# EAGLE board Quarfinder rj45 (EAGLE 9.0.1)
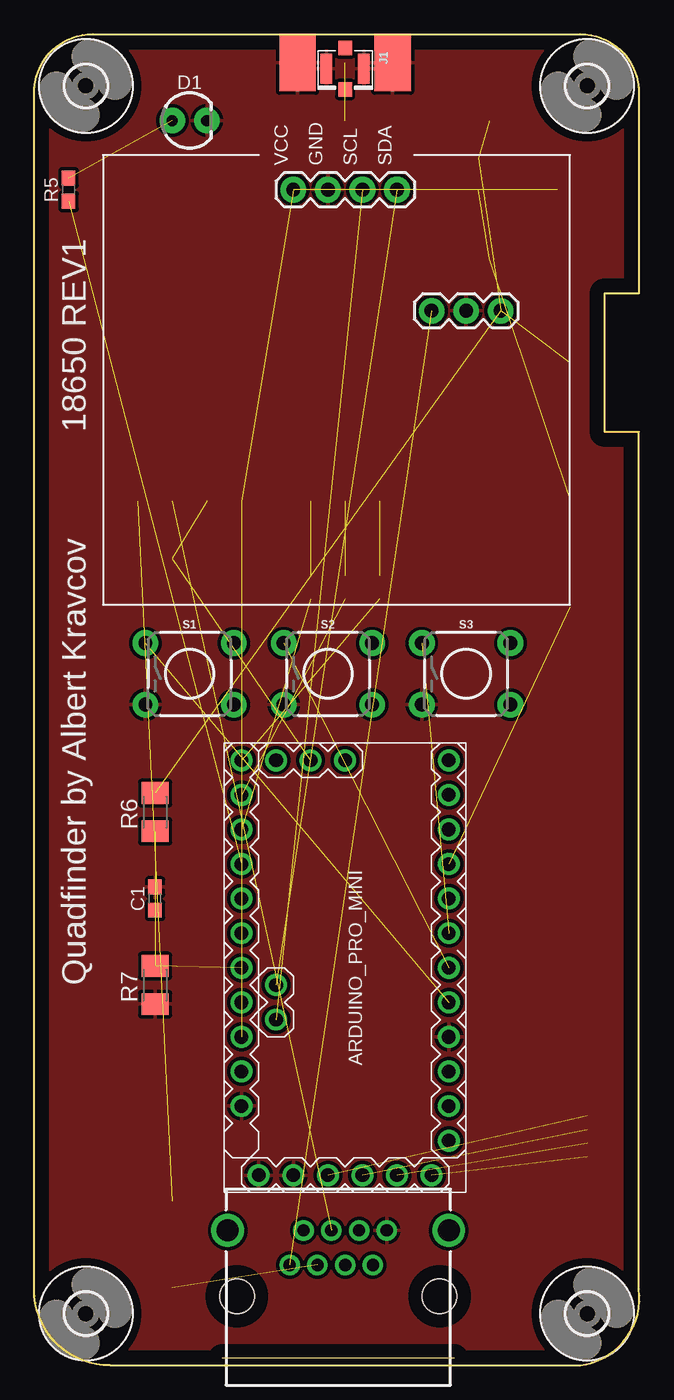
[diagram p0: board, top side]
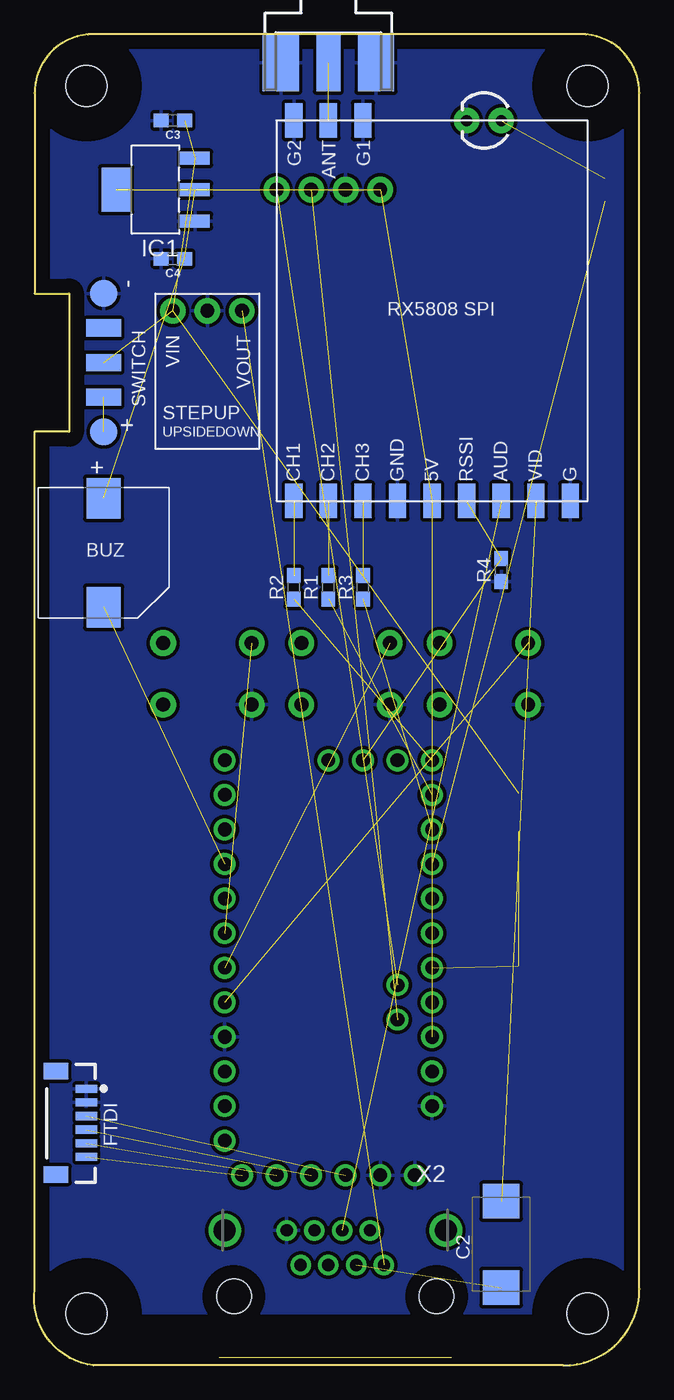
[diagram p1: board, bottom side, seen from below]

Size 44.49 x 97.79 mm. Coordinates in mm from the lower left corner, seen from the top.
Outline: 0,5.61 0,93.45 arc-90 4.34,97.79 40.11,97.79 arc-90 44.45,93.45 44.45,78.74 41.91,78.74 41.91,68.58 44.45,68.58 44.45,5.61 arc-90 40.11,0 5.61,0 arc-90 0,5.61
Copper layers (1*16): Top 0.035mm / dielectric 1.5mm / Bottom 0.035mm
Design rules "default *": minimum track width 6mil, minimum drill 0.35mm, track to track 6mil, track to pad 6mil, pad to pad 6mil, via to via 6mil, smd to smd 6mil, copper to edge 40mil, drill to drill 6mil, minimum pad ring 12mil, minimum via ring 8mil, stop-mask expansion 4mil, vias tented up to drill 2mm, thermal gap 10mil
Net classes: 0 default: width 0.254 mm, drill 0.254 mm, clearance 0.254 mm; 1 power: width 0.406 mm, drill 0.406 mm, clearance 0.406 mm

## Footprints (pad centres in the part's own frame; a part is rotated, then mirrored left to right if it is on the bottom)
SMD1,27-2,54 = smd 1.27 x 2.54: 1 0,0
TP20R = smd 2 x 2: TP 0,0
ARDUINO-PRO-MINI = drill 1: J1.1 -15.24,6.35; J1.2 -15.24,3.81; J1.3 -15.24,1.27; J1.4 -15.24,-1.27; J1.5 -15.24,-3.81; J1.6 -15.24,-6.35; J2.1 -1.27,5.08; J2.2 -3.81,5.08; J3.1 15.24,0; J3.2 15.24,2.54; J3.3 15.24,5.08; J6.2 -10.16,7.62; J6.3 -7.62,7.62; J6.4 -5.08,7.62; J6.5 -2.54,7.62; J6.6 0,7.62; J6.7 2.54,7.62; J6.8 5.08,7.62; J6.9 7.62,7.62; J6.10 10.16,7.62; J6.11 12.7,7.62; J6.12 15.24,7.62; J7.1 15.24,-7.62; J7.2 12.7,-7.62; J7.3 10.16,-7.62; J7.4 7.62,-7.62; J7.5 5.08,-7.62; J7.6 2.54,-7.62; J7.7 0,-7.62; J7.8 -2.54,-7.62; J7.9 -5.08,-7.62; J7.10 -7.62,-7.62; J7.11 -10.16,-7.62; J7.12 -12.7,-7.62
CUI_CMI-9653S-SMT = smd 3 x 2.5: N -4,0; P 4,0
0603 = smd 1.1 x 1: 1 -0.85,0; 2 0.85,0
D/7343-31R = smd 2.55 x 2.7: + 3.175,0; - -3.175,0
LED_3MM = drill 0.813 pad 1.88: A -1.27,0; K 1.27,0
JST-6-SMD-VERT-1.0MM = smd 0.6 x 1.55: 1 -2.54,1.27; 2 -1.54,1.27; 3 -0.54,1.27; 4 0.46,1.27; 5 1.46,1.27; 6 2.46,1.27 | smd 1.2 x 1.8: P$1 -3.84,-0.955; P$2 3.76,-0.955
3,0 = hole 3: 0,0
SOT223 = smd 0.95 x 2.15: 1 -2.3,-2.9; 2 0,-2.9; 3 2.3,-2.9 | smd 3.25 x 2.15: 4 0,2.9
U.FL = smd 2.2 x 0.85: 1 0,1.375; 2 0,-1.375 | smd 1.05 x 1: FEED 1.525,0; NC -1.525,0
1X04 = drill 1.016 pad 1.88: 1 0,0; 2 2.54,0; 3 5.08,0; 4 7.62,0
M1206 = smd 1.6 x 2: 1 -1.4,0; 2 1.4,0
TACTILE_SWITCH_PTH_6.0MM = drill 1.016 pad 1.88: 1 -3.251,2.261; 2 3.251,2.261; 3 -3.251,-2.261; 4 3.251,-2.261
1X03 = drill 1.016 pad 1.88: 1 0,0; 2 2.54,0; 3 5.08,0
J502-ND-142-0711-821/826 = smd 4.191 x 1.778: 1 2.115,0 | smd 4.191 x 2.667: G@1 2.115,3.495; G@2 2.115,-3.495 | smd 4.191 x 2.667 bottom: G@3 2.115,3.495; G@4 2.115,-3.495
GLX-S-88M = drill 0.9 pad 1.422: 1 -3.57,-2.3; 2 -2.55,-4.84; 3 -1.53,-2.3; 4 -0.51,-4.84; 5 0.51,-2.3; 6 1.53,-4.84; 7 2.55,-2.3; 8 3.57,-4.84 | drill 1.6 pad 2.184: S1 -8.125,-4.84; S2 8.125,-4.84 | hole 2.55: -7.44,0; 7.44,0

## Placement (x,y rotation side)
5V  [SMD1,27-2,54]  15.24,63.5 0 bottom
+  TPTP20R  [TP20R]  39.37,68.58 270 bottom
-  TPTP20R  [TP20R]  39.37,78.74 270 bottom
ANT  [SMD1,27-2,54]  22.86,91.44 0 bottom
ARDUINO_PRO_MINI  ARDUINO-PRO-MINI-QUADFINDER  [ARDUINO-PRO-MINI]  22.86,29.21 90 top
AUD  [SMD1,27-2,54]  10.16,63.5 0 bottom
BUZ  CMI-9653S-SMT  [CUI_CMI-9653S-SMT]  39.37,59.69 90 bottom
C1  100nF  [0603]  8.89,34.29 90 top
C2  [D/7343-31R]  10.16,8.89 90 bottom
C3  100uF  [0603]  34.29,91.44 180 bottom
C4  100uF  [0603]  34.29,81.28 180 bottom
CH1  [SMD1,27-2,54]  25.4,63.5 0 bottom
CH2  [SMD1,27-2,54]  22.86,63.5 0 bottom
CH3  [SMD1,27-2,54]  20.32,63.5 0 bottom
D1  [LED_3MM]  11.43,91.44 0 top
FTDI  JST_6_PIN_VERTICAL  [JST-6-SMD-VERT-1.0MM]  41.91,17.78 270 bottom
G  [SMD1,27-2,54]  5.08,63.5 0 bottom
G1  [SMD1,27-2,54]  20.32,91.44 0 bottom
G2  [SMD1,27-2,54]  25.4,91.44 0 bottom
GND  [SMD1,27-2,54]  17.78,63.5 0 bottom
H1  MOUNT-HOLE3.0  [3,0]  3.81,3.81 0 top
H2  MOUNT-HOLE3.0  [3,0]  3.81,93.98 0 top
H3  MOUNT-HOLE3.0  [3,0]  40.64,3.81 0 top
H4  MOUNT-HOLE3.0  [3,0]  40.64,93.98 0 top
IC1  LM1117MP-5.0  [SOT223]  35.56,86.36 90 bottom
J1  U.FL  [U.FL]  22.86,95.25 270 top
J2  [1X04]  19.05,86.36 0 top
R1  1k  [0603]  22.86,57.15 90 bottom
R2  1k  [0603]  25.4,57.15 90 bottom
R3  1k  [0603]  20.32,57.15 90 bottom
R4  100k  [0603]  10.16,58.42 90 bottom
R5  330  [0603]  2.54,86.36 270 top
R6  [M1206]  8.89,40.64 90 top
R7  [M1206]  8.89,27.94 90 top
RSSI  [SMD1,27-2,54]  12.7,63.5 0 bottom
S1  MOMENTARY-SWITCH-SPST-PTH-6.0MM  [TACTILE_SWITCH_PTH_6.0MM]  11.43,50.8 0 top
S2  MOMENTARY-SWITCH-SPST-PTH-6.0MM  [TACTILE_SWITCH_PTH_6.0MM]  21.59,50.8 0 top
S3  MOMENTARY-SWITCH-SPST-PTH-6.0MM  [TACTILE_SWITCH_PTH_6.0MM]  31.75,50.8 0 top
STEPUP  [1X03]  29.21,77.47 0 top
SW0  [SMD1,27-2,54]  39.37,76.2 90 bottom
SW1  [SMD1,27-2,54]  39.37,71.12 90 bottom
SWITCH  [SMD1,27-2,54]  39.37,73.66 90 bottom
VID  [SMD1,27-2,54]  7.62,63.5 0 bottom
X1  SMA-142-0711-821/826  [J502-ND-142-0711-821/826]  22.86,97.79 270 bottom
X2  GLX-S-88M  [GLX-S-88M]  22.35,5.08 180 bottom

## Library data of the parts
5V ANT AUD CH1-CH3 G G1 G2 GND RSSI SW0 SW1 SWITCH VID = wirepad
+ - = testpad
ARDUINO_PRO_MINI = diy-modules
BUZ = CMI-9653S-SMT; AVAILABILITY: Unavailable; CUI_PURCHASE_URL: https://www.cui.com/product/audio/buzzers/audio-indicators/magnetic/cmi-9653s-smt?utm_source=snapeda.com&utm_medium=referral&utm_campaign=snapedaBOM; DESCRIPTION: CMI Series Square 9.6 x 5 mm 2.7 kHz 3 V 80 dBA SMT Magnetic Buzzer Indicator; MF: CUI Inc.; MP: CMI-9653S-SMT-TR; PACKAGE: SIP-5 CUI; PRICE: None
C1 C3 C4 = SparkFun-Capacitors; PROD_ID: CAP-00868
C2 = rcl; SPICEPREFIX: C
D1 = SparkFun-LED; PROD_ID: DIO-08794
FTDI = SparkFun-Connectors; PROD_ID: CONN-08249; SF_ID: GPS-00579
H1-H4 = holes
IC1 = lm1117_10; MF: Texas Instruments; MPN: LM1117MP-5.0; OC_FARNELL: 9778209; OC_NEWARK: 28X3417
J1 = SparkFun-Connectors; PROD_ID: CONN-09193; SF_ID: WRL-09144
J2 = SparkFun-Connectors; PROD_ID: CONN-09696
R1-R5 = SparkFun-Resistors; PROD_ID: RES-07856
R6 R7 = resistor
S1-S3 = SparkFun-Switches; PROD_ID: SWCH-08441; SF_SKU: COM-00097
STEPUP = SparkFun-Connectors
X1 = con-coax; MF: JOHNSON COMPONENTS; MPN: 142-0711-821; OC_FARNELL: 1019328; OC_NEWARK: 16F3627
X2 = con-kycon; OC_FARNELL: unknown; OC_NEWARK: unknown

## Nets
5V [power]: 5V.1 ARDUINO_PRO_MINI.J6.4 BUZ.P C4.1 IC1.2 IC1.4 J2.1
9V [power]: STEPUP.1 X2.1
CH1: ARDUINO_PRO_MINI.J6.12 R2.1
CH2: ARDUINO_PRO_MINI.J6.11 R1.1
CH3: ARDUINO_PRO_MINI.J6.10 R3.1
DTR: ARDUINO_PRO_MINI.J1.6 FTDI.6
GND: -.TP ARDUINO_PRO_MINI.J1.1 ARDUINO_PRO_MINI.J1.2 ARDUINO_PRO_MINI.J6.2 ARDUINO_PRO_MINI.J7.9 C1.2 C3.2 C4.2 D1.K FTDI.1 FTDI.2 G1.1 G2.1 G.1 GND.1 IC1.1 J1.1 J1.2 J2.2 R4.1 R7.1 S1.3 S2.3 S3.3 STEPUP.2 X1.G@1 X1.G@2 X1.G@3 X1.G@4 X2.8
N$1: ANT.1 J1.FEED X1.1
N$2: C2.+ VID.1
N$3: CH2.1 R1.2
N$4: CH1.1 R2.2
N$5: CH3.1 R3.2
N$6: ARDUINO_PRO_MINI.J2.1 J2.4
N$7: ARDUINO_PRO_MINI.J2.2 J2.3
N$8: ARDUINO_PRO_MINI.J3.2 R4.2 RSSI.1
N$9: ARDUINO_PRO_MINI.J7.8 S1.1
N$10: ARDUINO_PRO_MINI.J7.4 BUZ.N
N$11: ARDUINO_PRO_MINI.J7.7 S2.1
N$12: ARDUINO_PRO_MINI.J7.6 S3.1
N$13: D1.A R5.1
N$14: ARDUINO_PRO_MINI.J6.9 R5.2
N$15 [power]: ARDUINO_PRO_MINI.J6.6 C1.1 R6.1 R7.2
N$16: AUD.1 X2.4
N$18: C2.- X2.3
N$19: X2.2
N$22: X2.5
N$23: X2.6
N$24: X2.7
RAWSWITCH [power]: C3.1 IC1.3 R6.2 STEPUP.3 SWITCH.1
RXD: ARDUINO_PRO_MINI.J1.4 FTDI.4
TXD: ARDUINO_PRO_MINI.J1.5 FTDI.5
VCC: ARDUINO_PRO_MINI.J1.3 FTDI.3
VIN [power]: +.TP SW1.1

## Tracks (layer width: path | path; a pad name or v marks a point on that pad's centre or on a via)
5V  (6 unrouted)
9V  (1 unrouted)
CH1  (1 unrouted)
CH2  (1 unrouted)
CH3  (1 unrouted)
DTR  (1 unrouted)
GND
  pour Top: -3.81,101.6 48.26,101.6 46.99,99.06 46.99,0 -3.81,0
  pour Bottom: -5.08,102.87 -5.08,3.81 49.53,3.81 49.53,102.87
N$1  (2 unrouted)
N$2  (1 unrouted)
N$3  (1 unrouted)
N$4  (1 unrouted)
N$5  (1 unrouted)
N$6  (1 unrouted)
N$7  (1 unrouted)
N$8  (2 unrouted)
N$9  (1 unrouted)
N$10  (1 unrouted)
N$11  (1 unrouted)
N$12  (1 unrouted)
N$13  (1 unrouted)
N$14  (1 unrouted)
N$15  (3 unrouted)
N$16  (1 unrouted)
N$18  (1 unrouted)
RAWSWITCH  (4 unrouted)
RXD  (1 unrouted)
TXD  (1 unrouted)
VCC  (1 unrouted)
VIN  (1 unrouted)

## Text on the board
tNames: VCC | GND | SCL | SDA | 18650 REV1 | Quadfinder by Albert Kravcov
bNames: RX5808 SPI | VOUT | VIN | STEPUP | UPSIDEDOWN